# EAGLE board Volterra Doughter Board (EAGLE 9.1.3)
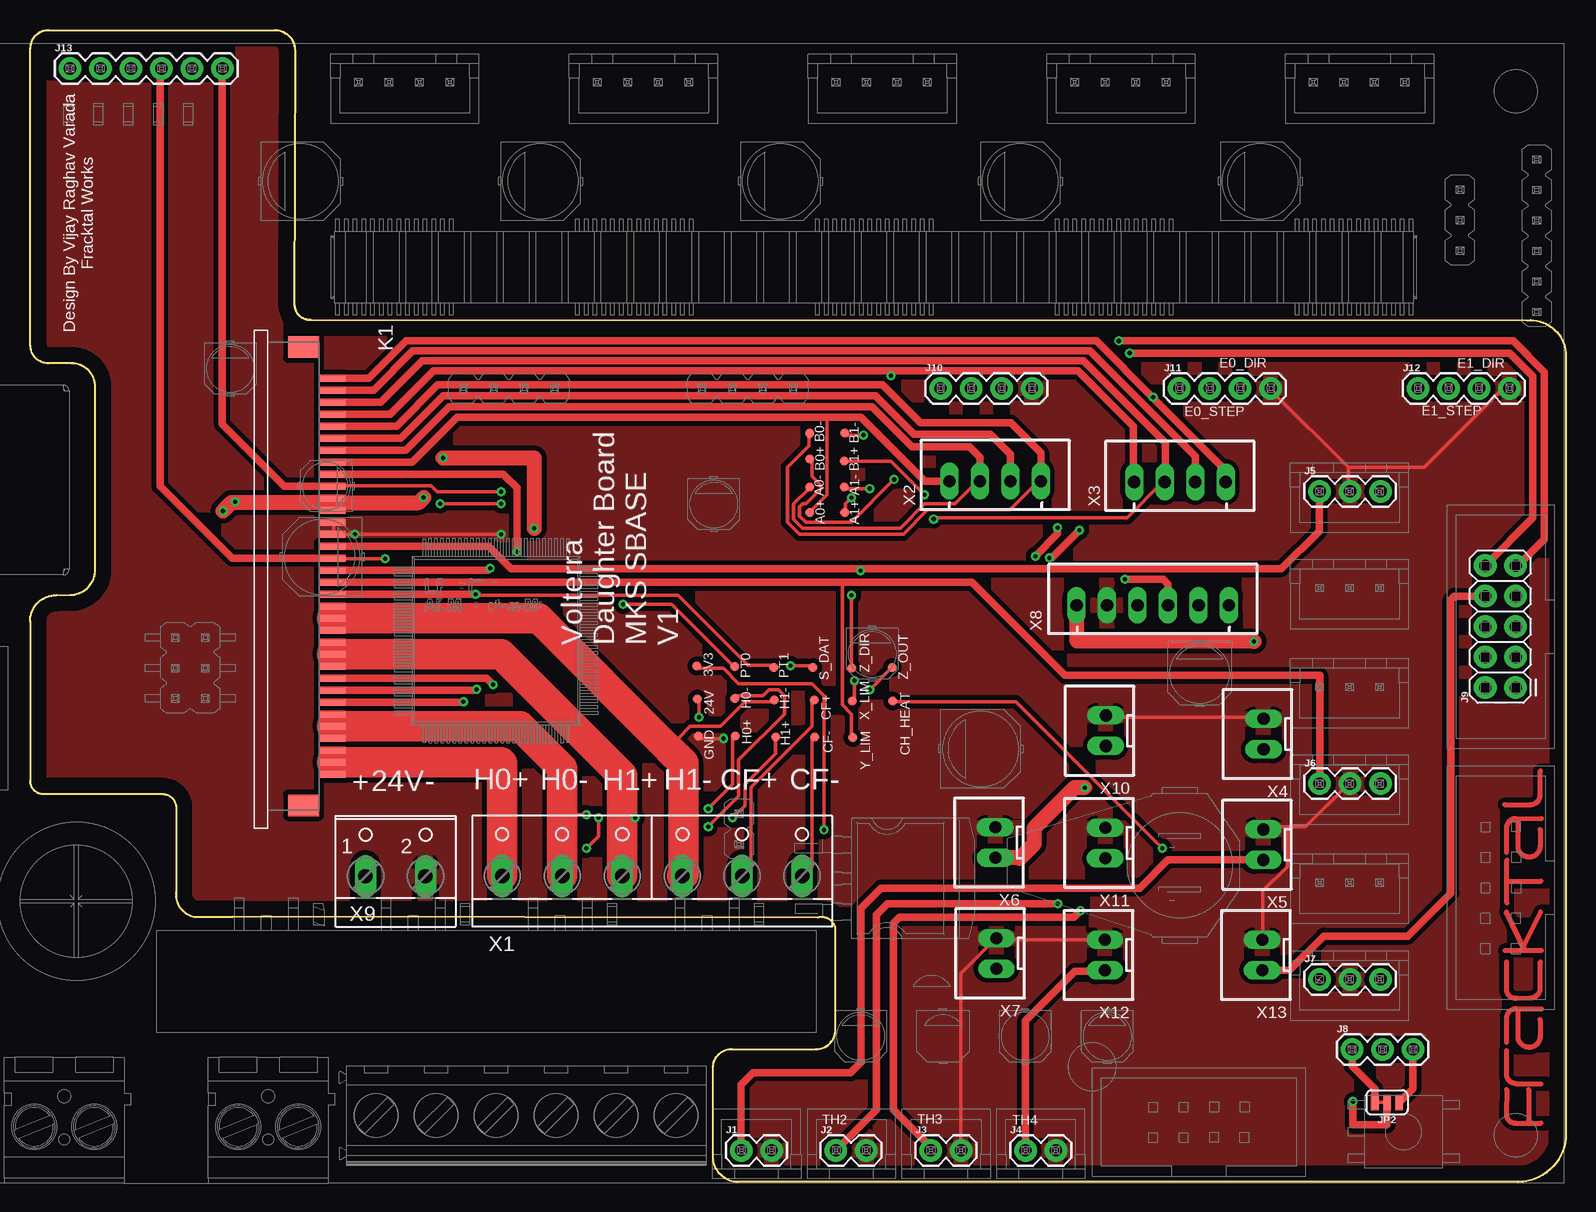
[diagram p0: board, top side]
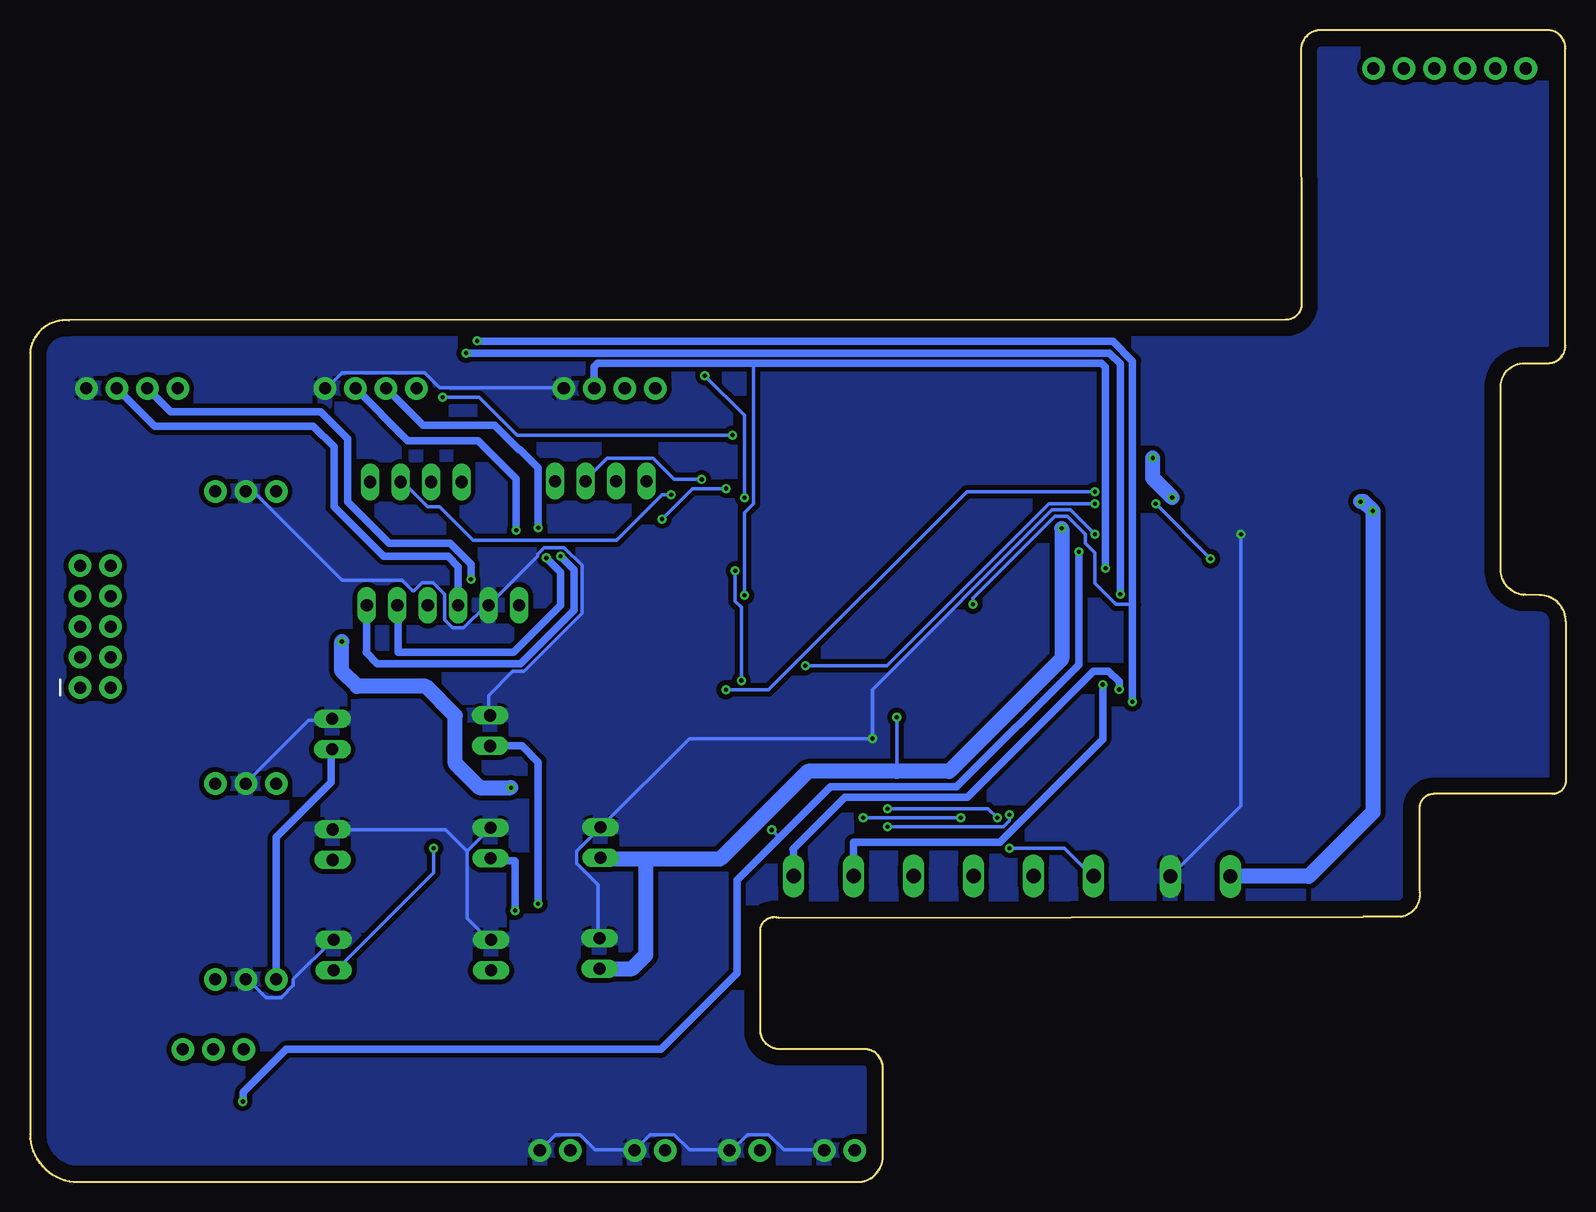
[diagram p1: board, bottom side, seen from below]

Size 128.03 x 96 mm. Coordinates in mm from the lower left corner, seen from the top.
Outline: 124.79,71.81 arc-90 128.03,69.1 128.03,4 arc-90 124.03,0 59.06,0 arc-90 56.93,2.12 56.93,9.51 arc-90 58.48,11.07 65.54,11.07 arc90 67.15,12.67 67.15,21.2 arc90 65.61,22.03 16.92,22.09 13.73,22.09 arc-90 12.2,24.31 12.2,31.15 arc90 11.02,32.33 1.11,32.33 arc-90 0,33.44 0,46.71 arc-90 2.2,48.91 3.34,48.92 arc90 5.44,51.02 5.44,66.27 arc90 3.48,68.22 1.51,68.22 arc-90 0.04,69.7 0.04,94.47 arc-90 1.56,96 20.41,96 arc-90 22.09,94.32 22.03,73.13 arc90 23.36,71.86 124.79,71.81
Copper layers (1*16): Top 0.035mm / dielectric 1.5mm / Bottom 0.035mm
Design rules "LionCircuits": minimum track width 8mil, minimum drill 0.35mm, track to track 8mil, track to pad 8mil, pad to pad 8mil, via to via 8mil, smd to smd 8mil, copper to edge 50mil, drill to drill 10mil, minimum pad ring 10mil, minimum via ring 8mil, stop-mask expansion 4mil, vias tented up to drill 0mil, thermal gap 10mil
Net classes: 0 default: width 0.305 mm

## Footprints (pad centres in the part's own frame; a part is rotated, then mirrored left to right if it is on the bottom)
1X02 = drill 1.016 pad 1.88: 1 0,0; 2 2.54,0
1X03 = drill 1.016 pad 1.88: 1 0,0; 2 2.54,0; 3 5.08,0
2X5 = drill 1.016 pad 1.88: 1 0,0; 2 0,2.54; 3 2.54,0; 4 2.54,2.54; 5 5.08,0; 6 5.08,2.54; 7 7.62,0; 8 7.62,2.54; 9 10.16,0; 10 10.16,2.54
1X04 = drill 1.016 pad 1.88: 1 0,0; 2 2.54,0; 3 5.08,0; 4 7.62,0
1X06 = drill 1.016 pad 1.88: 1 0,0; 2 2.54,0; 3 5.08,0; 4 7.62,0; 5 10.16,0; 6 12.7,0
SMT-JUMPER_3_1-NC_TRACE_SILK = smd 0.635 x 1.27: 1 -1.016,0; 2 0,0; 3 1.016,0
34PIN/1MMPITCH/FFC/FPC = smd 0.6 x 2.2: 1 -14.43,2.1; 2 -13.43,2.1; 3 -12.43,2.1; 4 -11.43,2.1; 5 -10.43,2.1; 6 -9.43,2.1; 7 -8.43,2.1; 8 -7.43,2.1; 9 -6.43,2.1; 10 -5.43,2.1; 11 -4.43,2.1; 12 -3.43,2.1; 13 -2.43,2.1; 14 -1.43,2.1; 15 -0.43,2.1; 16 0.57,2.1; 17 1.57,2.1; 18 2.57,2.1; 19 3.57,2.1; 20 4.57,2.1; 21 5.57,2.1; 22 6.57,2.1; 23 7.57,2.1; 24 8.57,2.1; 25 9.57,2.1; 26 10.57,2.1; 27 11.57,2.1; 28 12.57,2.1; 29 13.57,2.1; 30 14.57,2.1; 31 15.57,2.1; 32 16.57,2.1; 33 17.57,2.1; 34 18.57,2.1 | smd 1.8 x 2.6: Z1 -17.03,-0.3; Z2 21.17,-0.3
PAD.03X.03 = smd 0.762 x 0.762: P$1 0,0
W237-6 = drill 1.194 long: 1 -12.5,-1.27; 2 -7.5,-1.27; 3 -2.5,-1.27; 4 2.5,-1.27; 5 7.5,-1.27; 6 12.5,-1.27
JST-XH-04-PACKAGE-LONG-PAD = drill 1.016 long: 1 -3.81,0; 2 -1.27,0; 3 1.27,0; 4 3.81,0
JST-XH-02-PACKAGE-LONG-PAD = drill 1.016 long: 1 -1.27,0; 2 1.27,0
JST-XH-06-PACKAGE-LONG-PAD = drill 1.016 long: 1 -6.35,0; 2 -3.81,0; 3 -1.27,0; 4 1.27,0; 5 3.81,0; 6 6.35,0
W237-102 = drill 1.194 long: 1 -2.5,-1.27; 2 2.5,-1.27

## Placement (x,y rotation side)
FRAME1  FRAME-LEDGER  [CREATIVE_COMMONS]  29.39,-10.26 0 top  (outside the outline)
J1  [1X02]  59.28,2.64 0 top
J2  [1X02]  67.18,2.64 0 top
J3  [1X02]  75.08,2.64 0 top
J4  [1X02]  82.98,2.64 0 top
J5  455-1750-1-ND  [1X03]  107.51,57.56 0 top
J6  455-1750-1-ND  [1X03]  107.51,33.2 0 top
J7  455-1750-1-ND  [1X03]  107.51,16.89 0 top
J8  455-1750-1-ND  [1X03]  110.21,11.05 0 top
J9  [2X5]  123.85,41.2 90 top
J10  [1X04]  75.91,66.14 0 top
J11  [1X04]  95.81,66.14 0 top
J12  [1X04]  115.71,66.14 0 top
J13  [1X06]  3.34,92.8 0 top
JP2  3V3/5 SEL  [SMT-JUMPER_3_1-NC_TRACE_SILK]  113.12,6.63 180 top
K1  FFC/FPC/34PIN/1MMPITCH/TOPLOCK  [34PIN/1MMPITCH/FFC/FPC]  23.1,52.55 270 top
TP1  TEST-POINT3  [PAD.03X.03]  67.91,62.41 270 top
TP2  TEST-POINT3  [PAD.03X.03]  67.88,60.1 270 top
TP3  TEST-POINT3  [PAD.03X.03]  67.88,57.9 270 top
TP4  TEST-POINT3  [PAD.03X.03]  67.91,55.79 270 top
TP5  TEST-POINT3  [PAD.03X.03]  64.99,62.4 270 top
TP6  TEST-POINT3  [PAD.03X.03]  64.99,60.24 270 top
TP7  TEST-POINT3  [PAD.03X.03]  64.99,57.91 270 top
TP8  TEST-POINT3  [PAD.03X.03]  65,55.8 270 top
TP9  TEST-POINT3  [PAD.03X.03]  71.88,42.86 0 top
TP10  TEST-POINT3  [PAD.03X.03]  55.63,40.23 0 top
TP11  TEST-POINT3  [PAD.03X.03]  55.71,37.15 0 top
TP12  TEST-POINT3  [PAD.03X.03]  68.55,40.07 0 top
TP13  TEST-POINT3  [PAD.03X.03]  65.27,42.89 0 top
TP14  TEST-POINT3  [PAD.03X.03]  68.49,42.85 0 top
TP15  TEST-POINT3  [PAD.03X.03]  68.59,37.06 0 top
TP16  TEST-POINT3  [PAD.03X.03]  61.99,42.89 0 top
TP17  TEST-POINT3  [PAD.03X.03]  62.05,40.17 0 top
TP18  TEST-POINT3  [PAD.03X.03]  62.17,37.07 0 top
TP19  TEST-POINT3  [PAD.03X.03]  65.38,40.17 0 top
TP20  TEST-POINT3  [PAD.03X.03]  65.41,37.07 0 top
TP21  TEST-POINT3  [PAD.03X.03]  58.74,42.95 0 top
TP22  TEST-POINT3  [PAD.03X.03]  58.75,40.3 0 top
TP23  TEST-POINT3  [PAD.03X.03]  58.8,37.17 0 top
TP24  TEST-POINT3  [PAD.03X.03]  55.6,43.01 0 top
TP25  TEST-POINT3  [PAD.03X.03]  71.91,40.08 0 top
U$1  FRACKTALLOGO  [FRACKTALLOGO]  126.06,16.89 90 top
X1  [W237-6]  51.87,26.77 0 top
X2  EXTDR-0  [JST-XH-04-PACKAGE-LONG-PAD]  80.45,58.41 0 top
X3  EXTDR-1  [JST-XH-04-PACKAGE-LONG-PAD]  95.86,58.33 0 top
X4  Z_LMT  [JST-XH-02-PACKAGE-LONG-PAD]  102.83,37.33 90 top
X5  BED_THERM  [JST-XH-02-PACKAGE-LONG-PAD]  102.81,28.11 90 top
X6  24V  [JST-XH-02-PACKAGE-LONG-PAD]  80.47,28.28 90 top
X7  24V  [JST-XH-02-PACKAGE-LONG-PAD]  80.56,19.05 90 top
X8  FILAMENT SENSOR  [JST-XH-06-PACKAGE-LONG-PAD]  93.6,48.07 0 top
X9  [W237-102]  30.47,26.75 0 top
X10  TH4  [JST-XH-02-PACKAGE-LONG-PAD]  89.67,37.6 90 top
X11  TH3  [JST-XH-02-PACKAGE-LONG-PAD]  89.64,28.24 90 top
X12  TH2  [JST-XH-02-PACKAGE-LONG-PAD]  89.6,18.91 90 top
X13  CH_HEAT  [JST-XH-02-PACKAGE-LONG-PAD]  102.72,18.92 90 top

## Library data of the parts
FRAME1 = SparkFun-Aesthetics
J1-J4 TP1-TP25 = SparkFun-Connectors
J5-J8 = SparkFun-Connectors; PROD_ID: XXX-00000
J9 = SparkFun-Connectors; PROD_ID: CONN-08499; SF_ID: PRT-0778
J10-J12 = SparkFun-Connectors; PROD_ID: CONN-09696
J13 = SparkFun-Connectors; PROD_ID: CONN-08437
JP2 = SparkFun-Jumpers
K1 U$1 = FracktalWorks_Eagle_Library
X1 = con-wago-500; OC_FARNELL: unknown; OC_NEWARK: unknown
X2-X8 X10-X13 = Rembrandt Electronics - JST XH Connectors v1-0
X9 = con-wago-500; MPN: 237-102; OC_FARNELL: unknown; OC_NEWARK: 70K9898

## Nets
3V3: JP2.2 K1.9 TP24.P$1
24V: K1.11 K1.12 TP10.P$1 X6.1 X7.1 X8.1 X9.1
A0+: K1.8 TP8.P$1 X2.1
A0-: K1.7 TP7.P$1 X2.2
A1+: K1.4 TP4.P$1 X3.1
A1-: K1.3 TP3.P$1 X3.2
B0+: K1.6 TP6.P$1 X2.3
B0-: K1.5 TP5.P$1 X2.4
B1+: K1.2 TP2.P$1 X3.3
B1-: K1.1 TP1.P$1 X3.4
BED_THERM: J1.1 X5.1
CF+: K1.26 TP19.P$1 X1.5
CF-: K1.27 TP20.P$1 X1.6
CH_HEAT: J9.8 TP25.P$1 X13.1
E0_DIR: J11.3 X8.5
E0_STEP: J11.2 X8.6
E1_DIR: J12.3 X8.3
E1_STEP: J12.2 X8.4
GND: J1.2 J2.2 J3.2 J4.2 J5.2 J6.2 J7.2 J10.4 J11.4 J12.4 K1.13 K1.14 TP11.P$1 X4.2 X5.2 X6.2 X7.2 X8.2 X9.2 X10.2 X11.2 X12.2 X13.2
H0+: K1.32 K1.33 K1.34 TP23.P$1 X1.1
H0-: K1.29 K1.30 K1.31 TP22.P$1 X1.2
H1+: K1.23 K1.24 K1.25 TP18.P$1 X1.3
H1-: K1.20 K1.21 K1.22 TP17.P$1 X1.4
N$1: J8.1 JP2.3
N$2: J8.3 JP2.1
N$3: J5.3
N$6: J6.3
N$10: J7.3
N$11: J13.1
N$12: J13.2
N$13: J13.3
N$15: J13.5
PT0: J9.9 K1.28 TP21.P$1
PT1: J9.10 K1.19 TP16.P$1
SERVO_DAT: J13.4 K1.16 TP13.P$1
TH2: J2.1 X10.1
TH3: J3.1 X11.1
TH4: J4.1 X12.1
X_LMT: J5.1 K1.15 TP12.P$1
Y_LMT: J6.1 K1.18 TP15.P$1
Z_DIR: J10.3 K1.17 TP14.P$1
Z_LMT: J7.1 X4.1
Z_OUT: J13.6 K1.10 TP9.P$1

## Tracks (layer width: path | path; a pad name or v marks a point on that pad's centre or on a via)
3V3  (via drill 0.35)
  Top 0.305: v66.19,29.34 66.19,40.51 65.18,41.53 59.08,41.53 57.81,42.8 55.78,42.8 TP24.P$1 | JP2.2 113.12,5.99
  Top 0.61: K1.9 39.46,58.98 39.69,58.74 40.6,57.84 v40.6,52.51 | v110.29,6.71 110.29,4.75 113.12,4.75 113.12,5.99
  Bottom 0.305: v66.19,29.34 65.68,28.83 65.54,28.69
  Bottom 0.61: v40.6,52.51 40.6,43.1 50.79,32.92 61.32,32.92 65.54,28.69 69.08,25.16 69.08,17.4 75.43,11.05 | 75.43,11.05 | 75.43,11.05 106.68,11.05 110.25,7.48 110.25,6.74 v110.29,6.71
24V  (via drill 0.35)
  Top 0.305: v55.78,38.73 55.78,40 TP10.P$1
  Top 0.508: K1.11 25.2,56.62 K1.12
  Top 1.27: v16.09,55.92 16.79,56.62 25.2,56.62 32.4,56.62 v32.82,57.04 | v87.93,32.86 87.07,32.86 83.71,29.49 83.71,28.16 82.51,26.96 82.46,27.01 X6.1 | v42.02,54.47 42.02,60.34 v34.43,60.34 | v102.03,45.03 101.99,45.07 87.29,45.07 87.29,48.03 X8.1
  Bottom 0.305: v55.78,38.73 55.78,34.67 55.78,34.23
  Bottom 1.27: X9.1 21.42,25.48 16.09,30.81 v16.09,55.92 16.87,56.69 v17.11,56.69 | v32.82,57.04 34.43,58.65 v34.43,60.34 | 76.54,26.91 70.51,26.91 63.2,34.23 55.78,34.23 51.38,34.23 42.02,43.59 v42.02,54.47 | 76.54,26.91 80.37,26.91 X6.1 | X7.1 77.84,17.78 76.7,18.92 76.7,26.76 76.54,26.91 | v87.93,32.86 90.55,32.86 92.58,34.89 92.58,38.86 95.02,41.3 100.76,41.3 102.03,42.57 v102.03,45.03
A0+
  Top 0.305: TP8.P$1 65.18,56.01 66.45,57.28 66.45,63.63 66.45,63.74
  Top 0.61: K1.8 31.84,59.98 35.6,63.74 66.45,63.74 69.25,63.74 74.59,58.41 X2.1
A0-
  Top 0.305: TP7.P$1 64.92,57.78 63.65,56.52 63.65,55.25 64.41,54.48 72.54,54.48 74.57,56.52 77.11,56.52 78.89,58.29 X2.2
  Top 0.61: K1.7 31.33,60.98 34.95,64.61 70.18,64.61 73.51,61.28 78.31,61.28 79.17,60.41 79.17,58.42 X2.2
A1+  (via drill 0.35)
  Top 0.305: v68.48,57.02 67.97,56.52 67.97,56.01 TP4.P$1 | v71.78,67.18 71.78,67.44 71.78,67.59
  Top 0.61: K1.4 30.04,63.98 33.64,67.59 71.78,67.59 87.34,67.59 91.97,62.96 91.97,58.41 X3.1
  Bottom 0.305: v68.48,57.02 68.48,63.88 v71.78,67.18
A1-  (via drill 0.35)
  Top 0.305: v70,57.78 67.97,57.78 TP3.P$1 | X3.2 94.39,58.29 91.47,55.37 75.46,55.37 v75.34,55.25
  Top 0.61: K1.3 29.24,64.98 32.69,68.43 87.83,68.43 94.64,61.62 94.64,58.38 X3.2
  Bottom 0.305: v70,57.78 72.8,57.78 v75.34,55.25
B0+  (via drill 0.35)
  Top 0.305: v72.03,58.55 68.48,54.99 64.67,54.99 64.16,55.5 64.16,56.26 64.41,56.52 64.67,56.52 65.94,57.78 65.94,58.04 65.18,58.8 65.18,60.07 TP6.P$1
  Top 0.61: K1.6 30.91,61.98 34.46,65.53 70.5,65.53 73.7,62.33 80.05,62.33 81.72,60.66 X2.3
  Bottom 0.305: v72.03,58.55 74.32,58.55 76.1,60.33 79.91,60.33 81.69,58.55 X2.3
B0-
  Top 0.305: TP5.P$1 64.92,62.36 64.92,61.34 63.14,59.56 63.14,54.99 64.16,53.98 72.8,53.98 74.83,56.01 81.69,56.01 83.97,58.29 X2.4
  Top 0.61: K1.5 30.55,62.98 34,66.43 71.06,66.43 74.23,63.26 81.76,63.26 84.26,60.76 X2.4
B1+  (via drill 0.35)
  Top 0.305: v74.57,57.28 71.78,60.07 67.97,60.07 TP2.P$1
  Top 0.61: K1.2 28.63,65.98 31.9,69.25 88.34,69.25 97.13,60.47 X3.3
  Bottom 0.305: v74.57,57.28 75.34,57.28 79.13,53.48 91.1,53.48 93.88,56.26 94.89,56.26 96.93,58.29 X3.3
B1-  (via drill 0.35)
  Top 0.305: v69.47,62.24 68.11,62.24 TP1.P$1 | v93.62,65.41 93.59,65.37
  Top 0.61: K1.1 28.23,66.98 31.37,70.11 88.88,70.09 93.59,65.37 99.71,59.26 99.71,58.37 X3.4
  Bottom 0.305: v69.47,62.24 87.41,62.24 90.58,65.41 v93.62,65.41
BED_THERM
  Top 0.61: X5.1 94.86,26.84 92.52,24.5 70.96,24.5 69.25,22.8 69.25,9.97 68.38,9.09 60.26,9.09 59.28,8.12 J1.1
CF+  (via drill 0.35)
  Top 0.305: TP19.P$1 65.18,40 65.18,37.97 60.1,32.89 60.1,26.03 59.59,25.53 X1.5
  Top 0.61: K1.26 38.08,41.98 v38.61,41.45
  Bottom 0.61: X1.5 59.39,25.52 59.39,28.31 47.18,28.31 38.61,36.88 v38.61,41.45
CF-  (via drill 0.35)
  Top 0.305: TP20.P$1 65.18,36.96 65.18,26.29 64.41,25.53 X1.6
  Top 0.61: K1.27 37.17,40.98 v37.24,41.05
  Bottom 0.61: v37.24,41.05 37.24,41.68 38.13,42.57 39.4,42.57 49.89,32.08 60.07,32.08 64.41,27.74 64.37,27.69 X1.6
CH_HEAT  (via drill 0.35)
  Top 0.305: v94.39,27.81 82.19,40 72.03,40 TP25.P$1
  Top 0.61: X13.1 104.99,17.65 107.84,20.5 114.86,20.5 118.44,24.08 118.44,48.51 118.75,48.82 J9.8
  Bottom 0.305: v94.39,27.81 94.39,25.78 102.51,17.65 X13.1
E0_DIR  (via drill 0.35)
  Top 0.61: v87.49,54.32 85.18,52.01 v84.99,52.01
  Bottom 0.61: J11.3 96.53,61.78 90.68,61.78 87.49,58.6 v87.49,54.32 | v84.99,52.01 83.81,50.83 83.81,48.04 87.72,44.13 97.36,44.13 97.36,48.02 X8.5
E0_STEP  (via drill 0.35)
  Top 0.61: v85.66,54.52 85.66,54.01 83.81,52.16 v83.81,52.13
  Bottom 0.61: J11.2 95.26,63.06 89.28,63.06 87.26,61.04 87.19,61.04 85.66,59.51 v85.66,54.52 | X8.6 99.95,44.2 100.01,44.13 99.09,43.2 87.12,43.2 82.68,47.65 82.68,51 v83.81,52.13
E1_DIR
  Bottom 0.61: J12.3 117.63,62.98 104.41,62.98 102.69,61.27 102.69,56.29 98.55,52.15 93.19,52.15 92.33,51.28 X8.3
E1_STEP  (via drill 0.35)
  Top 0.61: v91.28,50.22 94.46,50.22 94.87,49.81 X8.4
  Bottom 0.61: J12.2 116.29,64.19 103.81,64.19 101.56,61.94 101.56,56.68 98.11,53.23 93.01,53.23 91.28,51.49 v91.28,50.22
GND  (via drill 0.35)
  Top 0.305: 109.88,59.56 109.88,57.78 J5.2 | 109.88,59.56 103.53,65.91 J11.4 | 109.88,59.56 116.23,59.56 122.58,65.91 123.09,65.91 J12.4 | 104.8,29.59 106.32,29.59 109.88,33.15 J6.2 | 104.8,29.59 103.02,29.59 X5.2 | 104.8,29.59 104.8,26.29 102.77,24.26 102.77,20.19 X13.2 | X10.2 89.81,38.73 102.77,38.73 X4.2 | K1.13 25.3,54.74 25.3,54.23 K1.14 25.3,53.98 v27.08,53.98 v39.27,53.98 | X12.2 89.56,20.19 80.67,20.19 X7.2 80.42,20.19 77.62,17.4 77.62,2.67 J3.2 | v57.81,36.96 55.78,36.96 TP11.P$1
  Bottom 0.305: J10.4 83.72,66.17 93.88,66.17 95.15,67.44 102.01,67.44 103.28,66.17 J11.4 | X10.2 89.81,38.99 89.81,40.51 87.78,42.55 86.85,42.55 82.02,47.38 82.02,51.38 83.5,52.87 85.17,52.87 85.72,52.31 85.72,52.14 X8.2 | X13.2 102.77,20.19 106.07,16.89 106.07,16.38 107.09,15.37 108.36,15.37 109.88,16.89 J7.2 | X4.2 103.02,38.48 104.8,38.48 109.88,33.4 J6.2 | J5.2 109.88,57.53 109.37,57.53 102.01,50.17 97.02,50.17 96.11,49.26 96.02,49.26 95.33,49.95 94.41,49.95 93.45,48.99 93.45,46.84 92.79,46.19 91.87,46.19 89.99,48.07 X8.2 | v27.08,53.98 27.08,31.37 32.92,25.53 X9.2 | J1.2 61.87,2.67 65.18,2.67 66.45,3.94 68.22,3.94 69.49,2.67 J2.2 69.75,2.67 73.05,2.67 74.32,3.94 76.35,3.94 77.62,2.67 | 77.62,2.67 80.92,2.67 82.19,3.94 84.23,3.94 85.5,2.67 J4.2 | 77.62,2.67 J3.2 77.62,2.67 | 91.59,27.56 89.81,29.34 X11.2 | 91.59,27.56 91.59,21.97 89.81,20.19 X12.2 | X7.2 80.67,20.45 80.67,24.77 82.45,26.54 82.45,27.56 80.67,29.34 X6.2 80.42,29.59 73.05,36.96 v57.81,36.96 57.81,41.02 42.82,56.01 41.3,56.01 v39.27,53.98 | 91.59,27.56 93.37,29.34 102.77,29.34 X5.2 | X8.2 89.81,48.04 X8.2
  pour Top (isolate 0.406): 0.18,96.14 22.42,96.14 22.42,72.01 128.22,72.01 128.22,0.04 56.63,0.04 56.63,11.1 67.14,11.1 67.14,21.77 12.32,21.77 12.32,32.04 -0.03,32.04 -0.03,48.7 5.56,48.7 5.56,68.08 0.17,68.08 0.17,96.14
  pour Bottom (isolate 0.406): 0.03,96.39 22.38,96.39 22.38,71.91 128.19,71.91 128.19,0.15 56.79,0.15 56.79,11.3 67.2,11.3 67.2,21.77 12.43,21.77 12.43,31.99 0.13,31.99 0.13,48.51 5.31,48.51 5.31,68.08 0.03,68.08
H0+  (via drill 0.35)
  Top 0.305: v56.54,31.12 58.57,33.15 58.57,36.96 TP23.P$1 | v47.4,30.35 47.4,28.83 v46.38,27.81 | K1.34 25.3,33.91 25.3,34.98 25.3,35.94 K1.32
  Top 2.54: K1.33 25.3,34.98 39.29,34.98 39.37,34.9 X1.1
  Bottom 0.305: v56.54,31.12 48.16,31.12 v47.4,30.35 | v46.38,27.81 41.81,27.81 39.52,25.53 X1.1
H0-  (via drill 0.35)
  Top 0.305: v56.54,29.59 59.08,32.13 59.08,35.18 62.89,38.99 62.89,40.51 62.38,41.02 61.62,41.02 61.11,40.51 58.83,40.51 TP22.P$1 | v46.38,30.61 45.36,30.61 44.34,30.61 | K1.31 25.3,36.96 25.3,37.98 25.3,38.99 K1.29
  Top 2.54: K1.30 25.3,37.98 40.83,37.98 44.34,34.48 44.34,30.61 44.34,25.53 X1.2
  Bottom 0.305: v56.54,29.59 46.89,29.59 46.38,30.1 v46.38,30.61
H1+  (via drill 0.35)
  Top 0.305: v58.57,30.35 59.59,31.37 59.59,33.15 62.13,35.69 62.13,36.96 TP18.P$1 | v50.44,30.35 49.37,30.35 | K1.25 25.3,43.05 25.3,43.98 25.3,45.09 K1.23
  Top 2.54: K1.24 25.3,43.98 39.28,43.98 49.37,33.9 49.37,30.35 X1.3
  Bottom 0.305: v50.44,30.35 v58.57,30.35
H1-
  Top 0.305: TP17.P$1 61.87,40 59.59,40 57.56,37.97 55.02,37.97 54,36.96 53.21,36.16 | K1.22 25.3,46.1 25.3,46.98 25.3,47.88 K1.20
  Top 2.54: K1.21 25.3,46.98 42.39,46.98 53.21,36.16 54.47,34.9 54.47,25.61 X1.4
N$1
  Top 0.305: 112.1,7.26 112.1,6.95 112.05,6.9 112.05,6.64 | 112.05,7.05 112.05,6.63 112.05,6.64 | 112.05,6.64 112.1,6.64 JP2.3 | JP2.3 112.05,6.68 | 112.05,6.68 112.05,7.05 | JP2.3 112.05,6.68 | 112.05,6.68 112.05,7.05 | JP2.3 112.1,7 112.05,7.05
  Top 0.61: J8.1 110.21,9.67 112.1,7.77 112.1,7.26
N$2
  Top 0.61: J8.3 115.29,7.78 JP2.1
PT0  (via drill 0.35)
  Top 0.305: v49.43,48.13 53.49,48.13 58.57,43.05 TP21.P$1
  Top 0.61: K1.28 36.1,39.98 v36.13,40.02 | v90.75,70.09 123.64,70.09 126.24,67.49 126.24,53.58 124.02,51.36 J9.9
  Bottom 0.305: v49.43,48.13 49.43,48.64 42.57,55.5 41.55,55.5 40.03,53.98 40.03,53.21 39.27,52.45 39.27,49.91 37.49,48.13 36.22,48.13 36.13,48.13
  Bottom 0.61: v36.13,40.02 36.13,48.13 36.13,68.4 37.78,70.05 90.71,70.05 v90.75,70.09
PT1  (via drill 0.35)
  Top 0.305: TP16.P$1 61.87,43.05 59.84,43.05 54,48.89 37.24,48.89 v37.15,48.98
  Top 0.61: K1.19 v37.15,48.98 | v91.67,69.07 123.34,69.07 125.29,67.13 125.29,55.33 J9.10
  Bottom 0.61: v37.15,48.98 37.15,68.19 38.04,69.07 v91.67,69.07
SERVO_DAT  (via drill 0.35)
  Top 0.305: v34.19,56.52 v39.27,56.52 | v29.62,51.94 25.3,51.94 K1.16 | TP13.P$1 65.18,43.04 63.42,43.04 v63.4,43.02
  Top 0.61: K1.16 16.84,51.98 10.85,57.98 10.85,92.69 J13.4
  Bottom 0.305: v63.4,43.02 56.58,43.02 43.08,56.52 v39.27,56.52 | v29.62,51.94 v34.19,56.52
TH2  (via drill 0.35)
  Top 0.61: J2.1 70.57,6.03 70.57,22.28 71.48,23.18 v85.67,23.18
  Bottom 0.61: v85.67,23.18 85.67,34.99 87.02,36.34 X10.1
TH3  (via drill 0.35)
  Top 0.61: J3.1 75.08,2.93 72,6.02 72,21.58 72.47,22.05 87.01,22.05 v87.58,22.62
  Bottom 0.61: v87.58,22.62 87.58,26.73 87.62,26.77 89.43,26.77 X11.1
TH4
  Top 0.61: J4.1 82.98,13.44 87.1,17.55 89.51,17.55 X12.1
X_LMT  (via drill 0.35)
  Top 0.305: v68.73,41.78 68.73,40.26 TP12.P$1 | v69.24,50.93 69.24,51.11
  Top 0.61: K1.15 38.23,52.98 40.11,51.11 69.24,51.11 104.33,51.11 107.47,54.24 107.47,57.52 J5.1
  Bottom 0.305: v68.73,41.78 68.73,47.88 69.24,48.39 v69.24,50.93
Y_LMT
  Top 0.305: TP15.P$1 68.48,37.21 68.48,38.99 67.72,39.75 67.72,49.91 67.72,49.98
  Top 0.61: K1.18 67.72,49.98 78.52,49.98 86.28,42.22 107.51,42.22 J6.1
Z_DIR  (via drill 0.35)
  Top 0.305: v68.48,48.89 68.48,43.05 TP14.P$1
  Top 0.61: K1.17 38.21,50.98 v38.37,51.14
  Bottom 0.305: v68.48,48.89 68.48,55.75 67.72,56.52 67.72,67.94 67.72,68.21
  Bottom 0.61: v38.37,51.14 38.37,67.88 38.7,68.21 67.72,68.21 80.72,68.21 80.99,67.94 J10.3
Z_LMT
  Bottom 0.61: J7.1 107.51,28.73 102.93,33.3 102.93,35.95 X4.1
Z_OUT  (via drill 0.35)
  Top 0.305: v70,41.02 71.78,42.8 TP9.P$1 | v39.27,57.53 33.93,57.53 33.43,58.04 25.3,58.04 K1.10
  Top 0.61: K1.10 21.2,57.98 16.04,63.14 J13.6
  Bottom 0.305: v70,41.02 66.45,41.02 49.94,57.53 v39.27,57.53

## Text on the board
tPlace: + | 24V | - | H0+ | H0- | H1+ | H1- | CF+ | CF-
tNames: Design By Vijay Raghav Varada / Fracktal Works | E0_DIR | E1_DIR | E0_STEP | E1_STEP | B0- | B1- | B0+ | B1+ | A0- | A1- | A0+ | A1+ | Volterra / Daughter Board / MKS SBASE / V1 | Z_DIR | 3V3 | PT0 | PT1 | S_DAT | Z_OUT | H0- | 24V | H1- | CF+ | X_LIM | H0+ | H1+ | CF- | CH_HEAT | GND | Y_LIM | TH2 | TH3 | TH4